# Altium PCB 2019_10_ELEV_18_IO.PcbDoc
Units mm, origin at the board's own origin, x right, y up, seen from the top; angles counter-clockwise.
Board outline 311.28 x 52.83 mm, 2 copper layers (Top Layer, Bottom Layer); 110 components, 96 nets, 320 pads, 0 vias.
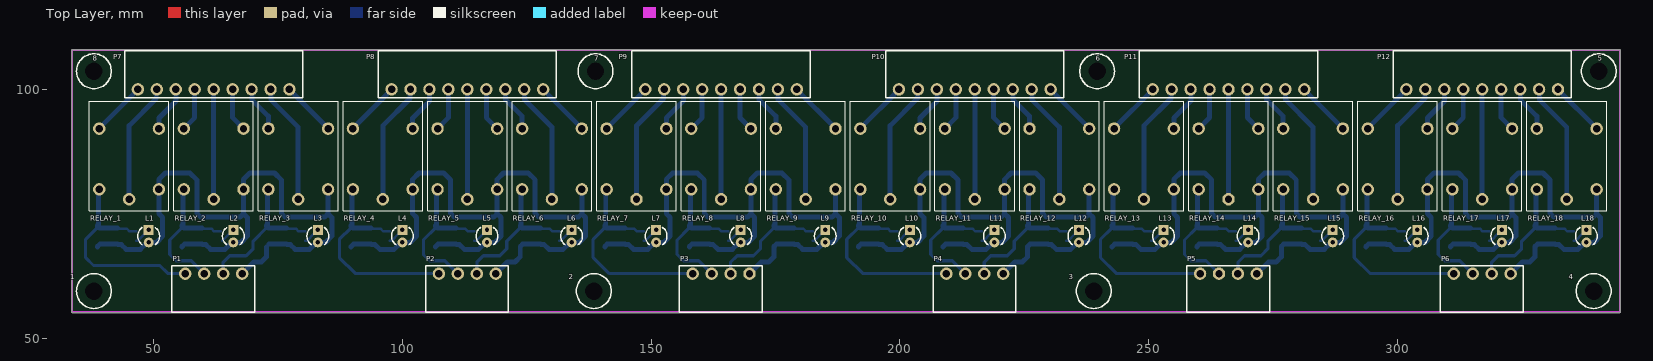
[diagram p0: Top Layer view]
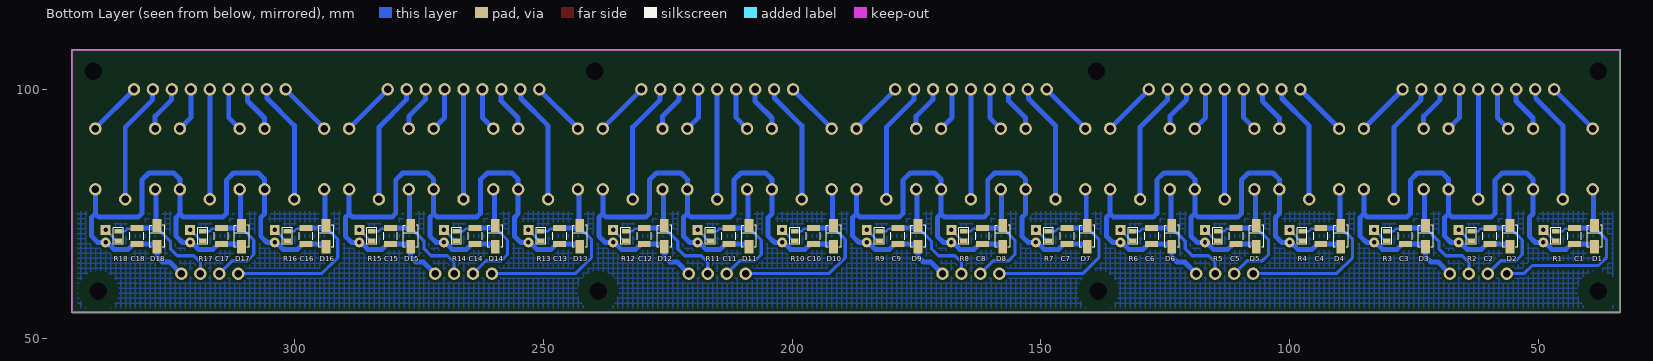
[diagram p1: Bottom Layer view, seen from below]
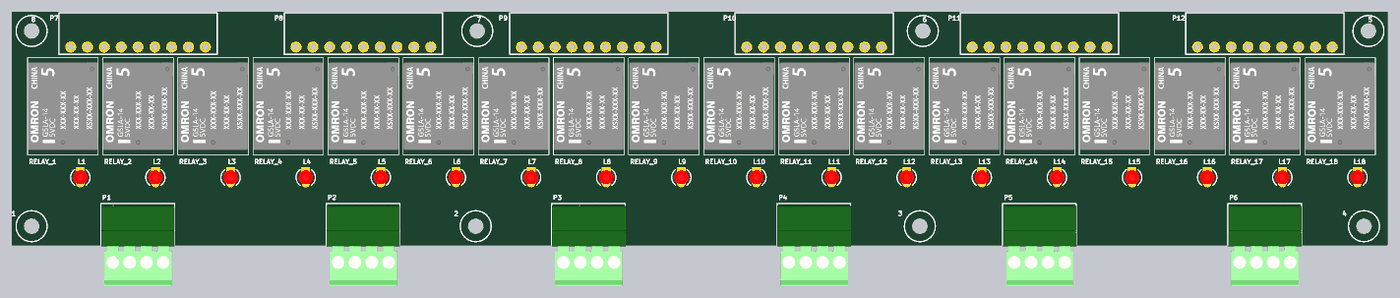
[diagram p2: 3D render of the assembled board from above, using the file's embedded part models]
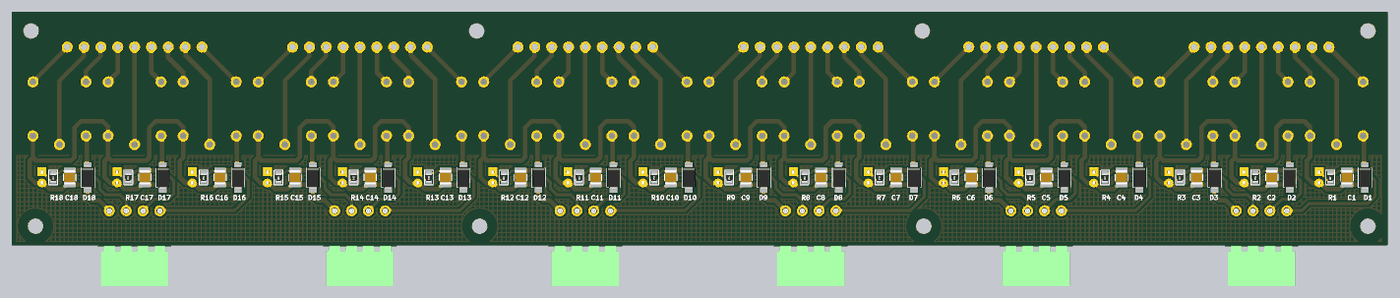
[diagram p3: 3D render of the assembled board from below, using the file's embedded part models]

## Layer stack, top to bottom
Top Solder: solder mask 0.0102, Solder Resist, Dk 3.5
Top Layer: signal copper 0.0356
Dielectric 1: dielectric 0.32, FR-4, Dk 4.8
Bottom Layer: signal copper 0.0356
Bottom Solder: solder mask 0.0102, Solder Resist, Dk 3.5

## Board outline
33.528,55.245 33.528,107.823 cw(c33.655,107.823) 33.655,107.95 344.678,107.95 cw(c344.678,107.823) 344.805,107.823 344.805,55.245 cw(c344.678,55.245) 344.678,55.118 33.655,55.118 cw(c33.655,55.245)

## Design rules (kind name [scope] priority, off if disabled: settings)
Clearance [All] p1: gap=0.508 ignorepadtopadclearanceinfootprint=FALSE
PolygonConnect [All] p1: connectstyle=Relief reliefconductorwidth=0.254 reliefentries=4 polygonreliefangle="90 Angle" airgapwidth=0.254
RoomDefinition 2019_10_ELEV_18_IO [InComponentClass('2019_10_ELEV_18_IO')] p1 off: confinementstyle=ConfineIn formatcopy=TRUE lockcomponents=FALSE outline 384.81,69.596 1269.746,69.596 1269.746,108.585 384.81,108.585
RoutingVias [All] p1: holewidth=0.711 width=1.27 viastyle="Through Hole" minholewidth=0.711 minwidth=1.27 maxholewidth=0.711 maxwidth=1.27
SolderMaskExpansion [All] p1: expansion=0.102
Width [All] p1: maxlimit=5 minlimit=0.254 preferedwidth=0.254
30 further rules are at their usual default settings.

## Components (designator, comment, footprint, x,y, rotation, side; value= is the part's Value field where it differs from the comment)
1 "LOVIT_1" VIT 37.973,59.436 r90 top
2 "LOVIT_1" VIT 138.472,59.436 r90 top
3 "LOVIT_1" VIT 238.972,59.436 r90 top
4 "LOVIT_1" VIT 339.471,59.436 r90 top
5 "LOVIT_1" VIT 340.487,103.632 r90 top
6 "LOVIT_1" VIT 239.649,103.632 r90 top
7 "LOVIT_1" VIT 138.811,103.632 r90 top
8 "LOVIT_1" VIT 37.973,103.632 r90 top
C1 "Capacitor" C1210C106M6PACTU 42.727,70.485 r270 bottom value=10uF/35V
C2 "Capacitor" C1210C106M6PACTU 59.727,70.485 r270 bottom value=10uF/35V
C3 "Capacitor" C1210C106M6PACTU 76.727,70.485 r270 bottom value=10uF/35V
C4 "Capacitor" C1210C106M6PACTU 93.727,70.485 r270 bottom value=10uF/35V
C5 "Capacitor" C1210C106M6PACTU 110.727,70.485 r270 bottom value=10uF/35V
C6 "Capacitor" C1210C106M6PACTU 127.727,70.485 r270 bottom value=10uF/35V
C7 "Capacitor" C1210C106M6PACTU 144.727,70.485 r270 bottom value=10uF/35V
C8 "Capacitor" C1210C106M6PACTU 161.727,70.485 r270 bottom value=10uF/35V
C9 "Capacitor" C1210C106M6PACTU 178.727,70.485 r270 bottom value=10uF/35V
C10 "Capacitor" C1210C106M6PACTU 195.727,70.485 r270 bottom value=10uF/35V
C11 "Capacitor" C1210C106M6PACTU 212.727,70.485 r270 bottom value=10uF/35V
C12 "Capacitor" C1210C106M6PACTU 229.727,70.485 r270 bottom value=10uF/35V
C13 "Capacitor" C1210C106M6PACTU 246.727,70.485 r270 bottom value=10uF/35V
C14 "Capacitor" C1210C106M6PACTU 263.727,70.485 r270 bottom value=10uF/35V
C15 "Capacitor" C1210C106M6PACTU 280.727,70.485 r270 bottom value=10uF/35V
C16 "Capacitor" C1210C106M6PACTU 297.727,70.485 r270 bottom value=10uF/35V
C17 "Capacitor" C1210C106M6PACTU 314.727,70.485 r270 bottom value=10uF/35V
C18 "Capacitor" C1210C106M6PACTU 331.727,70.485 r270 bottom value=10uF/35V
D1 "1N4007" DO-214AC 38.684,70.485 r90 bottom
D2 "1N4007" DO-214AC 55.684,70.485 r90 bottom
D3 "1N4007" DO-214AC 72.684,70.485 r90 bottom
D4 "1N4007" DO-214AC 89.684,70.485 r90 bottom
D5 "1N4007" DO-214AC 106.684,70.485 r90 bottom
D6 "1N4007" DO-214AC 123.684,70.485 r90 bottom
D7 "1N4007" DO-214AC 140.684,70.485 r90 bottom
D8 "1N4007" DO-214AC 157.684,70.485 r90 bottom
D9 "1N4007" DO-214AC 174.684,70.485 r90 bottom
D10 "1N4007" DO-214AC 191.684,70.485 r90 bottom
D11 "1N4007" DO-214AC 208.684,70.485 r90 bottom
D12 "1N4007" DO-214AC 225.684,70.485 r90 bottom
D13 "1N4007" DO-214AC 242.684,70.485 r90 bottom
D14 "1N4007" DO-214AC 259.684,70.485 r90 bottom
D15 "1N4007" DO-214AC 276.684,70.485 r90 bottom
D16 "1N4007" DO-214AC 293.684,70.485 r90 bottom
D17 "1N4007" DO-214AC 310.684,70.485 r90 bottom
D18 "1N4007" DO-214AC 327.684,70.485 r90 bottom
L1 "LED0" LED_3MM 49,70.489 r270 top
L2 "LED0" LED_3MM 66,70.489 r270 top
L3 "LED0" LED_3MM 83,70.489 r270 top
L4 "LED0" LED_3MM 100,70.489 r270 top
L5 "LED0" LED_3MM 117,70.489 r270 top
L6 "LED0" LED_3MM 134,70.489 r270 top
L7 "LED0" LED_3MM 151,70.489 r270 top
L8 "LED0" LED_3MM 168,70.489 r270 top
L9 "LED0" LED_3MM 185,70.489 r270 top
L10 "LED0" LED_3MM 202,70.489 r270 top
L11 "LED0" LED_3MM 219,70.489 r270 top
L12 "LED0" LED_3MM 236,70.489 r270 top
L13 "LED0" LED_3MM 253,70.489 r270 top
L14 "LED0" LED_3MM 270,70.489 r270 top
L15 "LED0" LED_3MM 287,70.489 r270 top
L16 "LED0" LED_3MM 304,70.489 r270 top
L17 "LED0" LED_3MM 321,70.489 r270 top
L18 "LED0" LED_3MM 338,70.489 r270 top
P1 "Header 4" TERMINAL_4PIN_381MM 62.054,62.928 r0 top
P2 "Header 4" TERMINAL_4PIN_381MM 113.054,62.928 r0 top
P3 "Header 4" TERMINAL_4PIN_381MM 164.054,62.928 r0 top
P4 "Header 4" TERMINAL_4PIN_381MM 215.054,62.928 r0 top
P5 "Header 4" TERMINAL_4PIN_381MM 266.054,62.928 r0 top
P6 "Header 4" TERMINAL_4PIN_381MM 317.054,62.928 r0 top
P7 "Header 9" TERMINAL_6PIN_381MM 62.054,100 r180 top
P8 "Header 9" TERMINAL_6PIN_381MM 113.054,100 r180 top
P9 "Header 9" TERMINAL_6PIN_381MM 164.054,100 r180 top
P10 "Header 9" TERMINAL_6PIN_381MM 215.054,100 r180 top
P11 "Header 9" TERMINAL_6PIN_381MM 266.054,100 r180 top
P12 "Header 9" TERMINAL_6PIN_381MM 317.054,100 r180 top
R1 "Resistor" CRCW080510K0FKEAC 46.482,70.485 r90 bottom value=2K2
R2 "Resistor" CRCW080510K0FKEAC 63.482,70.485 r90 bottom value=2K2
R3 "Resistor" CRCW080510K0FKEAC 80.482,70.485 r90 bottom value=2K2
R4 "Resistor" CRCW080510K0FKEAC 97.482,70.485 r90 bottom value=2K2
R5 "Resistor" CRCW080510K0FKEAC 114.482,70.485 r90 bottom value=2K2
R6 "Resistor" CRCW080510K0FKEAC 131.482,70.485 r90 bottom value=2K2
R7 "Resistor" CRCW080510K0FKEAC 148.482,70.485 r90 bottom value=2K2
R8 "Resistor" CRCW080510K0FKEAC 165.482,70.485 r90 bottom value=2K2
R9 "Resistor" CRCW080510K0FKEAC 182.482,70.485 r90 bottom value=2K2
R10 "Resistor" CRCW080510K0FKEAC 199.482,70.485 r90 bottom value=2K2
R11 "Resistor" CRCW080510K0FKEAC 216.482,70.485 r90 bottom value=2K2
R12 "Resistor" CRCW080510K0FKEAC 233.482,70.485 r90 bottom value=2K2
R13 "Resistor" CRCW080510K0FKEAC 250.482,70.485 r90 bottom value=2K2
R14 "Resistor" CRCW080510K0FKEAC 267.482,70.485 r90 bottom value=2K2
R15 "Resistor" CRCW080510K0FKEAC 284.482,70.485 r90 bottom value=2K2
R16 "Resistor" CRCW080510K0FKEAC 301.482,70.485 r90 bottom value=2K2
R17 "Resistor" CRCW080510K0FKEAC 318.482,70.485 r90 bottom value=2K2
R18 "Resistor" CRCW080510K0FKEAC 335.482,70.485 r90 bottom value=2K2
RELAY_1 "Component_1" RELAY_JS1-24V-F 45.054,85 r90 top
RELAY_2 "Component_1" RELAY_JS1-24V-F 62.054,85 r90 top
RELAY_3 "Component_1" RELAY_JS1-24V-F 79.054,85 r90 top
RELAY_4 "Component_1" RELAY_JS1-24V-F 96.054,85 r90 top
RELAY_5 "Component_1" RELAY_JS1-24V-F 113.054,85 r90 top
RELAY_6 "Component_1" RELAY_JS1-24V-F 130.054,85 r90 top
RELAY_7 "Component_1" RELAY_JS1-24V-F 147.054,85 r90 top
RELAY_8 "Component_1" RELAY_JS1-24V-F 164.054,85 r90 top
RELAY_9 "Component_1" RELAY_JS1-24V-F 181.054,85 r90 top
RELAY_10 "Component_1" RELAY_JS1-24V-F 198.054,85 r90 top
RELAY_11 "Component_1" RELAY_JS1-24V-F 215.054,85 r90 top
RELAY_12 "Component_1" RELAY_JS1-24V-F 232.054,85 r90 top
RELAY_13 "Component_1" RELAY_JS1-24V-F 249.054,85 r90 top
RELAY_14 "Component_1" RELAY_JS1-24V-F 266.054,85 r90 top
RELAY_15 "Component_1" RELAY_JS1-24V-F 283.054,85 r90 top
RELAY_16 "Component_1" RELAY_JS1-24V-F 300.054,85 r90 top
RELAY_17 "Component_1" RELAY_JS1-24V-F 317.054,85 r90 top
RELAY_18 "Component_1" RELAY_JS1-24V-F 334.054,85 r90 top

## Footprints (in the part's own frame and the unit in brackets; to place one, negate y for a bottom-side part, rotate by r counter-clockwise, add the part's x,y. Pads: shape width x height; smd on the part's side, far side on the other; paste and mask are expansions set on the pad)
C1210C106M6PACTU [mm] "Multilayer Ceramic Capacitors MLCC - SMD/SMT 35V 10uF X5R 1210 20%"
  rect 1.2x2.6 smd: 1(-1.6,0) 2(1.6,0)
  silkscreen extent -0.76,-1.4 0.76,1.4, body extent -1.6,-1.25 1.6,1.25, height 1
CRCW080510K0FKEAC [mm] "Thick Film Resistors - SMD 1/8Watt 10Kohms 1%"
  rect 0.9x1.5 smd: 1(-0.95,0) 2(0.95,0)
  silkscreen extent -1.65,-0.98 1.65,0.98, body extent -1.13,-0.63 0.87,0.62, height 0.46
DO-214AC [mm]
  rect 2.65x1.75 smd: 1(-2.15,0) 2(2.15,0)
  silkscreen extent -2.23,-1.52 2.14,1.45, body extent -2.71,-1.53 2.89,1.42, height 2.7
LED_3MM [mm]
  rect 2x2 hole 0.9: 1(-1.27,0)
  round 2 hole 0.9: 2(1.27,0)
  silkscreen extent -1.78,-2.19 1.78,2.18, body extent -1.66,-1.65 1.55,1.64, height 4.98
RELAY_JS1-24V-F [mm]
  round 2.5 hole 1.5: 1(-5.1,6) 2(-5.1,-6) 3(7.1,-6) 4(7.1,6) 5(-7.1,0)
  silkscreen extent -9.4,-8 12.6,8, body extent -8.3,-7.9 11.5,7.9, height 15.8
TERMINAL_4PIN_381MM [mm]
  round 2.5 hole 1.5: 1(-5.715,0) 2(-1.905,0) 3(1.905,0) 4(5.715,0)
  silkscreen extent -8.38,-7.75 8.25,1.65, body extent -8.31,-17.13 8.31,1.27, height 7.89
TERMINAL_6PIN_381MM [mm]
  round 2.5 hole 1.5: 1(-15.24,0) 2(-11.43,0) 3(-7.62,0) 4(-3.81,0) 5(0,0) 6(3.81,0) 7(7.62,0) 8(11.43,0) 9(15.24,0)
  silkscreen extent -17.91,-7.75 17.91,1.65
VIT [mm]
  round 0 hole 3.5: 1(0,0)
  silkscreen extent -3.5,-3.5 3.5,3.5

## Part data
C1 C2 C3 C4 C5 C6 C7 C8 C9 C10 C11 C12 C13 C14 C15 C16 C17 C18: library part C1210C106M6PAC, "Multilayer Ceramic Capacitors MLCC - SMD/SMT 35V 10uF X5R 1210 20%", Supplier Part Number 1=80-C1210C106M6PAC, Supplier 1=Mouser
D1 D2 D3 D4 D5 D6 D7 D8 D9 D10 D11 D12 D13 D14 D15 D16 D17 D18: library part BYG21M-E3/TR, "Diode Rectifiers 1.5 Amp 1000 Volt", Supplier Part Number 1=625-BYG21M-E3, Supplier 1=Mouser
L1 L2 L3 L4 L5 L6 L7 L8 L9 L10 L11 L12 L13 L14 L15 L16 L17 L18: "Typical INFRARED GaAs LED", LatestRevisionDate=08-Jul-2005, LatestRevisionNote="Mech Layer 1 removed.", PackageDescription="LED; 2 Leads", PackageReference=LED-0, Published=8-Jun-2000, Publisher="Altium Limited"
P1 P2 P3 P4 P5 P6: "Header, 4-Pin", LatestRevisionDate=17-Jul-2002, LatestRevisionNote="Re-released for DXP Platform.", Publisher="Altium Limited"
P7 P8 P9 P10 P11 P12: "Header, 9-Pin", LatestRevisionDate=17-Jul-2002, LatestRevisionNote="Re-released for DXP Platform.", Publisher="Altium Limited"
R1 R2 R3 R4 R5 R6 R7 R8 R9 R10 R11 R12 R13 R14 R15 R16 R17 R18: library part RC0805JR-131KL, "Thick Film Resistors - SMD 1K OHM 5%", Supplier Part Number 1=603-RC0805JR-131KL, Supplier 1=Mouser

## Nets (pads, with @x,y where several pads share a name; then routed paths per layer and width w, separated by ;. In a path a pad name is that pad's centre, name@x,y a point inside that pad or via, vN(x,y) a via of type N, cw(c..) or ccw(c..) an arc to the next point about the centre after c; other vN are vias at no path point)
COM_RELAY_1: P7.8 RELAY_1.5 | length 24.4
  Bottom Layer w1: RELAY_1.5 45.054,92.679 50.514,98.139 50.514,99.89 P7.8
COM_RELAY_2: P7.5 RELAY_2.5 | length 22.1
  Bottom Layer w1: RELAY_2.5 P7.5
COM_RELAY_3: P7.2 RELAY_3.5 | length 24.4
  Bottom Layer w1: P7.2 73.533,99.951 73.533,97.917 79.054,92.396 RELAY_3.5
COM_RELAY_4: P8.8 RELAY_4.5 | length 24.4
  Bottom Layer w1: RELAY_4.5 96.054,92.679 101.514,98.139 101.514,99.89 P8.8
COM_RELAY_5: P8.5 RELAY_5.5 | length 22.1
  Bottom Layer w1: RELAY_5.5 P8.5
COM_RELAY_6: P8.2 RELAY_6.5 | length 24.4
  Bottom Layer w1: P8.2 124.533,99.951 124.533,97.917 130.054,92.396 RELAY_6.5
COM_RELAY_7: P9.8 RELAY_7.5 | length 24.4
  Bottom Layer w1: RELAY_7.5 147.054,92.679 152.514,98.139 152.514,99.89 P9.8
COM_RELAY_8: P9.5 RELAY_8.5 | length 22.1
  Bottom Layer w1: RELAY_8.5 P9.5
COM_RELAY_9: P9.2 RELAY_9.5 | length 24.4
  Bottom Layer w1: P9.2 175.533,99.951 175.533,97.917 181.054,92.396 RELAY_9.5
COM_RELAY_10: P10.8 RELAY_10.5 | length 24.4
  Bottom Layer w1: RELAY_10.5 198.054,92.679 203.514,98.139 203.514,99.89 P10.8
COM_RELAY_11: P10.5 RELAY_11.5 | length 22.1
  Bottom Layer w1: RELAY_11.5 P10.5
COM_RELAY_12: P10.2 RELAY_12.5 | length 24.4
  Bottom Layer w1: P10.2 226.533,99.951 226.533,97.917 232.054,92.396 RELAY_12.5
COM_RELAY_13: P11.8 RELAY_13.5 | length 24.4
  Bottom Layer w1: RELAY_13.5 249.054,92.679 254.514,98.139 254.514,99.89 P11.8
COM_RELAY_14: P11.5 RELAY_14.5 | length 22.1
  Bottom Layer w1: RELAY_14.5 P11.5
COM_RELAY_15: P11.2 RELAY_15.5 | length 24.4
  Bottom Layer w1: P11.2 277.533,99.951 277.533,97.917 283.054,92.396 RELAY_15.5
COM_RELAY_16: P12.8 RELAY_16.5 | length 24.4
  Bottom Layer w1: RELAY_16.5 300.054,92.679 305.514,98.139 305.514,99.89 P12.8
COM_RELAY_17: P12.5 RELAY_17.5 | length 22.1
  Bottom Layer w1: RELAY_17.5 P12.5
COM_RELAY_18: P12.2 RELAY_18.5 | length 24.4
  Bottom Layer w1: P12.2 328.533,99.951 328.533,97.917 334.054,92.396 RELAY_18.5
NC_RELAY_1: P7.9 RELAY_1.4 | length 11.1
  Bottom Layer w1: RELAY_1.4 39.054,92.17 46.814,99.93 P7.9
NC_RELAY_2: P7.6 RELAY_2.4 | length 8.8
  Bottom Layer w1: RELAY_2.4 58.244,94.29 P7.6
NC_RELAY_3: P7.3 RELAY_3.4 | length 9.3
  Bottom Layer w1: P7.3 69.723,99.951 69.723,97.917 73.054,94.586 RELAY_3.4
NC_RELAY_4: P8.9 RELAY_4.4 | length 11.1
  Bottom Layer w1: RELAY_4.4 90.054,92.17 97.814,99.93 P8.9
NC_RELAY_5: P8.6 RELAY_5.4 | length 8.8
  Bottom Layer w1: RELAY_5.4 109.244,94.29 P8.6
NC_RELAY_6: P8.3 RELAY_6.4 | length 9.3
  Bottom Layer w1: P8.3 120.723,99.951 120.723,97.917 124.054,94.586 RELAY_6.4
NC_RELAY_7: P9.9 RELAY_7.4 | length 11.1
  Bottom Layer w1: RELAY_7.4 141.054,92.17 148.814,99.93 P9.9
NC_RELAY_8: P9.6 RELAY_8.4 | length 8.8
  Bottom Layer w1: RELAY_8.4 160.244,94.29 P9.6
NC_RELAY_9: P9.3 RELAY_9.4 | length 9.3
  Bottom Layer w1: P9.3 171.723,99.951 171.723,97.917 175.054,94.586 RELAY_9.4
NC_RELAY_10: P10.9 RELAY_10.4 | length 11.1
  Bottom Layer w1: RELAY_10.4 192.054,92.17 199.814,99.93 P10.9
NC_RELAY_11: P10.6 RELAY_11.4 | length 8.8
  Bottom Layer w1: RELAY_11.4 211.244,94.29 P10.6
NC_RELAY_12: P10.3 RELAY_12.4 | length 9.3
  Bottom Layer w1: P10.3 222.723,99.951 222.723,97.917 226.054,94.586 RELAY_12.4
NC_RELAY_13: P11.9 RELAY_13.4 | length 11.1
  Bottom Layer w1: RELAY_13.4 243.054,92.17 250.814,99.93 P11.9
NC_RELAY_14: P11.6 RELAY_14.4 | length 8.8
  Bottom Layer w1: RELAY_14.4 262.244,94.29 P11.6
NC_RELAY_15: P11.3 RELAY_15.4 | length 9.3
  Bottom Layer w1: P11.3 273.723,99.951 273.723,97.917 277.054,94.586 RELAY_15.4
NC_RELAY_16: P12.9 RELAY_16.4 | length 11.1
  Bottom Layer w1: RELAY_16.4 294.054,92.17 301.814,99.93 P12.9
NC_RELAY_17: P12.6 RELAY_17.4 | length 8.8
  Bottom Layer w1: RELAY_17.4 313.244,94.29 P12.6
NC_RELAY_18: P12.3 RELAY_18.4 | length 9.3
  Bottom Layer w1: P12.3 324.723,99.951 324.723,97.917 328.054,94.586 RELAY_18.4
NetL1_1: L1.1 R1.1 | length 3.4
  Bottom Layer w0.508: R1.1 46.782,69.535 48.254,71.007 48.254,71.013 L1.1
NetL2_1: L2.1 R2.1 | length 3.1
  Bottom Layer w0.508: R2.1@63.782,69.535 65.254,71.007 65.254,71.013 L2.1
NetL3_1: L3.1 R3.1 | length 3.4
  Bottom Layer w0.508: R3.1 80.782,69.535 82.254,71.007 82.254,71.013 L3.1
NetL4_1: L4.1 R4.1 | length 3.4
  Bottom Layer w0.508: R4.1 97.782,69.535 99.254,71.007 99.254,71.013 L4.1
NetL5_1: L5.1 R5.1 | length 3.4
  Bottom Layer w0.508: R5.1 114.782,69.535 116.254,71.007 116.254,71.013 L5.1
NetL6_1: L6.1 R6.1 | length 3.4
  Bottom Layer w0.508: R6.1 131.782,69.535 133.254,71.007 133.254,71.013 L6.1
NetL7_1: L7.1 R7.1 | length 3.4
  Bottom Layer w0.508: R7.1 148.782,69.535 150.254,71.007 150.254,71.013 L7.1
NetL8_1: L8.1 R8.1 | length 3.4
  Bottom Layer w0.508: R8.1 165.782,69.535 167.254,71.007 167.254,71.013 L8.1
NetL9_1: L9.1 R9.1 | length 3.4
  Bottom Layer w0.508: R9.1 182.782,69.535 184.254,71.007 184.254,71.013 L9.1
NetL10_1: L10.1 R10.1 | length 3.4
  Bottom Layer w0.508: R10.1 199.782,69.535 201.254,71.007 201.254,71.013 L10.1
NetL11_1: L11.1 R11.1 | length 3.4
  Bottom Layer w0.508: R11.1 216.782,69.535 218.254,71.007 218.254,71.013 L11.1
NetL12_1: L12.1 R12.1 | length 3.4
  Bottom Layer w0.508: R12.1 233.782,69.535 235.254,71.007 235.254,71.013 L12.1
NetL13_1: L13.1 R13.1 | length 3.4
  Bottom Layer w0.508: R13.1 250.782,69.535 252.254,71.007 252.254,71.013 L13.1
NetL14_1: L14.1 R14.1 | length 3.4
  Bottom Layer w0.508: R14.1 267.782,69.535 269.254,71.007 269.254,71.013 L14.1
NetL15_1: L15.1 R15.1 | length 3.4
  Bottom Layer w0.508: R15.1 284.782,69.535 286.254,71.007 286.254,71.013 L15.1
NetL16_1: L16.1 R16.1 | length 3.4
  Bottom Layer w0.508: R16.1 301.782,69.535 303.254,71.007 303.254,71.013 L16.1
NetL17_1: L17.1 R17.1 | length 3.4
  Bottom Layer w0.508: R17.1 318.782,69.535 320.254,71.007 320.254,71.013 L17.1
NetL18_1: L18.1 R18.1 | length 3.4
  Bottom Layer w0.508: R18.1 335.782,69.535 337.254,71.007 337.254,71.013 L18.1
NO_RELAY_1: P7.7 RELAY_1.3 | length 9.3
  Bottom Layer w1: RELAY_1.3 51.054,94.234 54.483,97.663 54.483,99.951 P7.7
NO_RELAY_2: P7.4 RELAY_2.3 | length 8.8
  Bottom Layer w1: P7.4 65.864,94.29 RELAY_2.3
NO_RELAY_3: P7.1 RELAY_3.3 | length 11.1
  Bottom Layer w1: P7.1 77.294,99.93 85.054,92.17 RELAY_3.3
NO_RELAY_4: P8.7 RELAY_4.3 | length 9.3
  Bottom Layer w1: RELAY_4.3 102.054,94.234 105.483,97.663 105.483,99.951 P8.7
NO_RELAY_5: P8.4 RELAY_5.3 | length 8.8
  Bottom Layer w1: P8.4 116.864,94.29 RELAY_5.3
NO_RELAY_6: P8.1 RELAY_6.3 | length 11.1
  Bottom Layer w1: P8.1 128.294,99.93 136.054,92.17 RELAY_6.3
NO_RELAY_7: P9.7 RELAY_7.3 | length 9.3
  Bottom Layer w1: RELAY_7.3 153.054,94.234 156.483,97.663 156.483,99.951 P9.7
NO_RELAY_8: P9.4 RELAY_8.3 | length 8.8
  Bottom Layer w1: P9.4 167.864,94.29 RELAY_8.3
NO_RELAY_9: P9.1 RELAY_9.3 | length 11.1
  Bottom Layer w1: P9.1 179.294,99.93 187.054,92.17 RELAY_9.3
NO_RELAY_10: P10.7 RELAY_10.3 | length 9.3
  Bottom Layer w1: RELAY_10.3 204.054,94.234 207.483,97.663 207.483,99.951 P10.7
NO_RELAY_11: P10.4 RELAY_11.3 | length 8.8
  Bottom Layer w1: P10.4 218.864,94.29 RELAY_11.3
NO_RELAY_12: P10.1 RELAY_12.3 | length 11.1
  Bottom Layer w1: P10.1 230.294,99.93 238.054,92.17 RELAY_12.3
NO_RELAY_13: P11.7 RELAY_13.3 | length 9.3
  Bottom Layer w1: RELAY_13.3 255.054,94.234 258.483,97.663 258.483,99.951 P11.7
NO_RELAY_14: P11.4 RELAY_14.3 | length 8.8
  Bottom Layer w1: P11.4 269.864,94.29 RELAY_14.3
NO_RELAY_15: P11.1 RELAY_15.3 | length 11.1
  Bottom Layer w1: P11.1 281.294,99.93 289.054,92.17 RELAY_15.3
NO_RELAY_16: P12.7 RELAY_16.3 | length 9.3
  Bottom Layer w1: RELAY_16.3 306.054,94.234 309.483,97.663 309.483,99.951 P12.7
NO_RELAY_17: P12.4 RELAY_17.3 | length 8.8
  Bottom Layer w1: P12.4 320.864,94.29 RELAY_17.3
NO_RELAY_18: P12.1 RELAY_18.3 | length 11.1
  Bottom Layer w1: P12.1 332.294,99.93 340.054,92.17 RELAY_18.3
SIG_COM_1: C1.2 C2.2 C3.2 D1.1 D2.1 D3.1 L1.2 L2.2 L3.2 P1.4 RELAY_1.2 RELAY_2.2 RELAY_3.2 | length 136.5
  Bottom Layer w1: D1.1 38.684,68.41 39.159,68.885 C1.2 42.827,68.785 43.483,68.785 44.45,67.818 47.329,67.818 48.729,69.219 L1.2 50.55,69.219 51.816,70.485 51.816,74.228 51.054,74.99 RELAY_1.2 51.054,81.915 52.324,83.185 57.277,83.185 58.674,81.788 58.674,75.057 59.436,74.295 67.359,74.295 68.054,74.99 ; D2.1 55.684,68.41 56.159,68.885 C2.2 59.827,68.785 60.483,68.785 61.45,67.818 64.329,67.818 65.729,69.219 L2.2 67.55,69.219 68.816,70.485 68.816,74.228 68.054,74.99 ; P1.4 70.119,65.278 71.628,65.278 72.684,66.334 D3.1 ; D3.1@73.159,68.885 C3.2 76.827,68.785 77.483,68.785 78.45,67.818 81.329,67.818 82.729,69.219 L3.2 84.55,69.219 85.816,70.485 85.816,74.228 85.054,74.99 ; RELAY_3.2 85.054,74.99 ; 68.054,74.99 RELAY_2.2 68.054,81.915 69.324,83.185 74.277,83.185 75.674,81.788 75.674,75.057 76.436,74.295 84.359,74.295 85.054,74.99
SIG_COM_2: C4.2 C5.2 C6.2 D4.1 D5.1 D6.1 L4.2 L5.2 L6.2 P2.4 RELAY_4.2 RELAY_5.2 RELAY_6.2 | length 137.3
  Bottom Layer w1: D4.1 89.684,68.41 90.159,68.885 C4.2 93.827,68.785 94.483,68.785 95.45,67.818 98.329,67.818 99.729,69.219 L4.2 101.55,69.219 102.816,70.485 102.816,74.228 102.054,74.99 RELAY_4.2 102.054,81.915 103.324,83.185 108.277,83.185 109.674,81.788 109.674,75.057 110.436,74.295 118.359,74.295 119.054,74.99 ; D5.1 106.684,68.41 107.159,68.885 C5.2 110.827,68.785 111.483,68.785 112.45,67.818 115.329,67.818 116.729,69.219 L5.2 118.55,69.219 119.816,70.485 119.816,74.228 119.054,74.99 ; P2.4 121.119,65.278 122.628,65.278 123.684,66.334 D6.1 123.684,68.41 124.159,68.885 C6.2 127.827,68.785 128.483,68.785 129.45,67.818 132.329,67.818 133.729,69.219 L6.2 135.55,69.219 136.816,70.485 136.816,74.228 136.054,74.99 ; RELAY_6.2 136.054,74.99 ; 119.054,74.99 RELAY_5.2 119.054,81.915 120.324,83.185 125.277,83.185 126.674,81.788 126.674,75.057 127.436,74.295 135.359,74.295 136.054,74.99
SIG_COM_3: C7.2 C8.2 C9.2 D7.1 D8.1 D9.1 L7.2 L8.2 L9.2 P3.4 RELAY_7.2 RELAY_8.2 RELAY_9.2 | length 137.3
  Bottom Layer w1: D7.1 140.684,68.41 141.159,68.885 C7.2 144.827,68.785 145.483,68.785 146.45,67.818 149.329,67.818 150.729,69.219 L7.2 152.55,69.219 153.816,70.485 153.816,74.228 153.054,74.99 RELAY_7.2 153.054,81.915 154.324,83.185 159.277,83.185 160.674,81.788 160.674,75.057 161.436,74.295 169.359,74.295 170.054,74.99 ; D8.1 157.684,68.41 158.159,68.885 C8.2 161.827,68.785 162.483,68.785 163.45,67.818 166.329,67.818 167.729,69.219 L8.2 169.55,69.219 170.816,70.485 170.816,74.228 170.054,74.99 ; P3.4 172.119,65.278 173.628,65.278 174.684,66.334 D9.1 174.684,68.41 175.159,68.885 C9.2 178.827,68.785 179.483,68.785 180.45,67.818 183.329,67.818 184.729,69.219 L9.2 186.55,69.219 187.816,70.485 187.816,74.228 187.054,74.99 ; RELAY_9.2 187.054,74.99 ; 170.054,74.99 RELAY_8.2 170.054,81.915 171.324,83.185 176.277,83.185 177.674,81.788 177.674,75.057 178.436,74.295 186.359,74.295 187.054,74.99
SIG_COM_4: C10.2 C11.2 C12.2 D10.1 D11.1 D12.1 L10.2 L11.2 L12.2 P4.4 RELAY_10.2 RELAY_11.2 RELAY_12.2 | length 137.3
  Bottom Layer w1: D10.1 191.684,68.41 192.159,68.885 C10.2 195.827,68.785 196.483,68.785 197.45,67.818 200.329,67.818 201.729,69.219 L10.2 203.55,69.219 204.816,70.485 204.816,74.228 204.054,74.99 RELAY_10.2 204.054,81.915 205.324,83.185 210.277,83.185 211.674,81.788 211.674,75.057 212.436,74.295 220.359,74.295 221.054,74.99 ; D11.1 208.684,68.41 209.159,68.885 C11.2 212.827,68.785 213.483,68.785 214.45,67.818 217.329,67.818 218.729,69.219 L11.2 220.55,69.219 221.816,70.485 221.816,74.228 221.054,74.99 ; P4.4 223.119,65.278 224.628,65.278 225.684,66.334 D12.1 225.684,68.41 226.159,68.885 C12.2 229.827,68.785 230.483,68.785 231.45,67.818 234.329,67.818 235.729,69.219 L12.2 237.55,69.219 238.816,70.485 238.816,74.228 238.054,74.99 ; RELAY_12.2 238.054,74.99 ; 221.054,74.99 RELAY_11.2 221.054,81.915 222.324,83.185 227.277,83.185 228.674,81.788 228.674,75.057 229.436,74.295 237.359,74.295 238.054,74.99
SIG_COM_5: C13.2 C14.2 C15.2 D13.1 D14.1 D15.1 L13.2 L14.2 L15.2 P5.4 RELAY_13.2 RELAY_14.2 RELAY_15.2 | length 137.3
  Bottom Layer w1: D13.1 242.684,68.41 243.159,68.885 246.727,68.885 246.827,68.785 247.483,68.785 248.45,67.818 251.329,67.818 252.729,69.219 L13.2 254.55,69.219 255.816,70.485 255.816,74.228 255.054,74.99 RELAY_13.2 255.054,81.915 256.324,83.185 261.277,83.185 262.674,81.788 262.674,75.057 263.436,74.295 271.359,74.295 272.054,74.99 ; D14.1 259.684,68.41 260.159,68.885 C14.2 263.827,68.785 264.483,68.785 265.45,67.818 268.329,67.818 269.729,69.219 L14.2 271.55,69.219 272.816,70.485 272.816,74.228 272.054,74.99 ; P5.4 274.119,65.278 275.628,65.278 276.684,66.334 D15.1 276.684,68.41 277.159,68.885 C15.2 280.827,68.785 281.483,68.785 282.45,67.818 285.329,67.818 286.729,69.219 L15.2 288.55,69.219 289.816,70.485 289.816,74.228 289.054,74.99 ; RELAY_15.2 289.054,74.99 ; 272.054,74.99 RELAY_14.2 272.054,81.915 273.324,83.185 278.277,83.185 279.674,81.788 279.674,75.057 280.436,74.295 288.359,74.295 289.054,74.99
SIG_COM_6: C16.2 C17.2 C18.2 D16.1 D17.1 D18.1 L16.2 L17.2 L18.2 P6.4 RELAY_16.2 RELAY_17.2 RELAY_18.2 | length 137.3
  Bottom Layer w1: D16.1 293.684,68.41 294.159,68.885 C16.2 297.827,68.785 298.483,68.785 299.45,67.818 302.329,67.818 303.729,69.219 L16.2 305.55,69.219 306.816,70.485 306.816,74.228 306.054,74.99 RELAY_16.2 306.054,81.915 307.324,83.185 312.277,83.185 313.674,81.788 313.674,75.057 314.436,74.295 322.359,74.295 323.054,74.99 ; D17.1 310.684,68.41 311.159,68.885 C17.2 314.827,68.785 315.483,68.785 316.45,67.818 319.329,67.818 320.729,69.219 L17.2 322.55,69.219 323.816,70.485 323.816,74.228 323.054,74.99 ; P6.4 325.119,65.278 326.628,65.278 327.684,66.334 D18.1 327.684,68.41 328.159,68.885 C18.2 331.827,68.785 332.483,68.785 333.45,67.818 336.329,67.818 337.729,69.219 L18.2 339.55,69.219 340.816,70.485 340.816,74.228 340.054,74.99 ; RELAY_18.2 340.054,74.99 ; 323.054,74.99 RELAY_17.2 323.054,81.915 324.324,83.185 329.277,83.185 330.674,81.788 330.674,75.057 331.436,74.295 339.359,74.295 340.054,74.99
SIG_IN_1: C1.1 D1.2 P1.1 R1.2 RELAY_1.1 | length 44.4
  Bottom Layer w0.508: C1.1 42.803,72.009 44.577,72.009 45.151,71.435 R1.2
  Bottom Layer w0.635: D1.2@38.684,72.46 38.684,72.185 36.322,69.823 36.322,66.167 37.91,64.579 51.244,64.579 52.832,62.992 56.275,62.992 P1.1
  Bottom Layer w1: RELAY_1.1 38.869,79.715 38.869,72.82 D1.2 38.684,72.46 39.059,72.085 C1.1
SIG_IN_2: C2.1 D2.2 P1.2 R2.2 RELAY_2.1 | length 31
  Bottom Layer w0.508: C2.1 59.803,72.009 61.577,72.009 62.151,71.435 R2.2
  Bottom Layer w0.635: D2.2@55.684,72.46 55.684,72.185 53.213,69.714 53.213,66.802 54.483,65.532 57.545,65.532 P1.2
  Bottom Layer w1: RELAY_2.1 55.869,79.715 55.869,72.82 D2.2 55.684,72.46 56.059,72.085 C2.1
SIG_IN_3: C3.1 D3.2 P1.3 R3.2 RELAY_3.1 | length 31.1
  Bottom Layer w0.508: C3.1 76.803,72.009 78.577,72.009 79.151,71.435 R3.2
  Bottom Layer w0.635: P1.3 63.959,65.229 65.278,66.548 68.58,66.548 69.977,67.945 69.977,69.478 72.684,72.185 D3.2
  Bottom Layer w1: RELAY_3.1 72.869,79.715 72.869,72.82 D3.2 72.684,72.46 73.059,72.085 C3.1
SIG_IN_4: C4.1 D4.2 P2.1 R4.2 RELAY_4.1 | length 44.1
  Bottom Layer w0.508: C4.1 93.803,72.009 95.577,72.009 96.151,71.435 R4.2
  Bottom Layer w0.635: D4.2@89.684,72.185 87.322,69.823 87.322,66.167 90.497,62.992 P2.1@107.275,62.992
  Bottom Layer w1: RELAY_4.1 89.869,79.715 89.869,72.82 D4.2 89.684,72.46 90.059,72.085 C4.1
SIG_IN_5: C5.1 D5.2 P2.2 R5.2 RELAY_5.1 | length 30.8
  Bottom Layer w0.508: C5.1 110.803,72.009 112.577,72.009 113.151,71.435 R5.2
  Bottom Layer w0.635: D5.2@106.684,72.185 104.213,69.714 104.213,66.802 105.483,65.532 108.545,65.532 P2.2
  Bottom Layer w1: RELAY_5.1 106.869,79.715 106.869,72.82 D5.2 106.684,72.46 107.059,72.085 C5.1
SIG_IN_6: C6.1 D6.2 P2.3 R6.2 RELAY_6.1 | length 30.6
  Bottom Layer w0.508: C6.1 127.803,72.009 129.577,72.009 130.151,71.435 R6.2
  Bottom Layer w0.635: P2.3 114.959,65.229 116.278,66.548 119.58,66.548 120.977,67.945 120.977,69.478 D6.2@123.684,72.185
  Bottom Layer w1: RELAY_6.1 123.869,79.715 123.869,72.82 D6.2 123.684,72.46 124.059,72.085 C6.1
SIG_IN_7: C7.1 D7.2 P3.1 R7.2 RELAY_7.1 | length 44.1
  Bottom Layer w0.508: C7.1 144.803,72.009 146.577,72.009 147.151,71.435 R7.2
  Bottom Layer w0.635: D7.2@140.684,72.185 138.322,69.823 138.322,66.167 141.497,62.992 P3.1@158.275,62.992
  Bottom Layer w1: RELAY_7.1 140.869,79.715 140.869,72.82 D7.2 140.684,72.46 141.059,72.085 C7.1
SIG_IN_8: C8.1 D8.2 P3.2 R8.2 RELAY_8.1 | length 30.8
  Bottom Layer w0.508: C8.1 161.803,72.009 163.577,72.009 164.151,71.435 R8.2
  Bottom Layer w0.635: D8.2@157.684,72.185 155.213,69.714 155.213,66.802 156.483,65.532 159.545,65.532 P3.2
  Bottom Layer w1: RELAY_8.1 157.869,79.715 157.869,72.82 D8.2 157.684,72.46 158.059,72.085 C8.1
SIG_IN_9: C9.1 D9.2 P3.3 R9.2 RELAY_9.1 | length 30.6
  Bottom Layer w0.508: C9.1 178.803,72.009 180.577,72.009 181.151,71.435 R9.2
  Bottom Layer w0.635: P3.3 165.959,65.229 167.278,66.548 170.58,66.548 171.977,67.945 171.977,69.478 D9.2@174.684,72.185
  Bottom Layer w1: RELAY_9.1 174.869,79.715 174.869,72.82 D9.2 174.684,72.46 175.059,72.085 C9.1
SIG_IN_10: C10.1 D10.2 P4.1 R10.2 RELAY_10.1 | length 44.1
  Bottom Layer w0.508: C10.1 195.803,72.009 197.577,72.009 198.151,71.435 R10.2
  Bottom Layer w0.635: D10.2@191.684,72.185 189.322,69.823 189.322,66.167 192.497,62.992 P4.1@209.275,62.992
  Bottom Layer w1: RELAY_10.1 191.869,79.715 191.869,72.82 D10.2 191.684,72.46 192.059,72.085 C10.1
SIG_IN_11: C11.1 D11.2 P4.2 R11.2 RELAY_11.1 | length 30.8
  Bottom Layer w0.508: C11.1 212.803,72.009 214.577,72.009 215.151,71.435 R11.2
  Bottom Layer w0.635: D11.2@208.684,72.185 206.213,69.714 206.213,66.802 207.483,65.532 210.545,65.532 P4.2
  Bottom Layer w1: RELAY_11.1 208.869,79.715 208.869,72.82 D11.2 208.684,72.46 209.059,72.085 C11.1
SIG_IN_12: C12.1 D12.2 P4.3 R12.2 RELAY_12.1 | length 30.6
  Bottom Layer w0.508: C12.1 229.803,72.009 231.577,72.009 232.151,71.435 R12.2
  Bottom Layer w0.635: P4.3 216.959,65.229 218.278,66.548 221.58,66.548 222.977,67.945 222.977,69.478 D12.2@225.684,72.185
  Bottom Layer w1: RELAY_12.1 225.869,79.715 225.869,72.82 D12.2 225.684,72.46 226.059,72.085 C12.1
SIG_IN_13: C13.1 D13.2 P5.1 R13.2 RELAY_13.1 | length 44.1
  Bottom Layer w0.508: C13.1@246.727,72.085 246.803,72.009 248.577,72.009 249.151,71.435 R13.2
  Bottom Layer w0.635: D13.2@242.684,72.185 240.322,69.823 240.322,66.167 243.497,62.992 P5.1@260.275,62.992
  Bottom Layer w1: RELAY_13.1 242.869,79.715 242.869,72.82 D13.2 242.684,72.46 243.059,72.085 C13.1@246.727,72.085
SIG_IN_14: C14.1 D14.2 P5.2 R14.2 RELAY_14.1 | length 30.8
  Bottom Layer w0.508: C14.1 263.803,72.009 265.577,72.009 266.151,71.435 R14.2
  Bottom Layer w0.635: D14.2@259.684,72.185 257.213,69.714 257.213,66.802 258.483,65.532 261.545,65.532 P5.2
  Bottom Layer w1: RELAY_14.1 259.869,79.715 259.869,72.82 D14.2 259.684,72.46 260.059,72.085 C14.1
SIG_IN_15: C15.1 D15.2 P5.3 R15.2 RELAY_15.1 | length 30.6
  Bottom Layer w0.508: C15.1 280.803,72.009 282.577,72.009 283.151,71.435 R15.2
  Bottom Layer w0.635: P5.3 267.959,65.229 269.278,66.548 272.58,66.548 273.977,67.945 273.977,69.478 D15.2@276.684,72.185
  Bottom Layer w1: RELAY_15.1 276.869,79.715 276.869,72.82 D15.2 276.684,72.46 277.059,72.085 C15.1
SIG_IN_16: C16.1 D16.2 P6.1 R16.2 RELAY_16.1 | length 44.1
  Bottom Layer w0.508: C16.1 297.803,72.009 299.577,72.009 300.151,71.435 R16.2
  Bottom Layer w0.635: D16.2@293.684,72.185 291.322,69.823 291.322,66.167 294.497,62.992 P6.1@311.275,62.992
  Bottom Layer w1: RELAY_16.1 293.869,79.715 293.869,72.82 D16.2 293.684,72.46 294.059,72.085 C16.1
SIG_IN_17: C17.1 D17.2 P6.2 R17.2 RELAY_17.1 | length 30.8
  Bottom Layer w0.508: C17.1 314.803,72.009 316.577,72.009 317.151,71.435 R17.2
  Bottom Layer w0.635: D17.2@310.684,72.185 308.213,69.714 308.213,66.802 309.483,65.532 312.545,65.532 P6.2
  Bottom Layer w1: RELAY_17.1 310.869,79.715 310.869,72.82 D17.2 310.684,72.46 311.059,72.085 C17.1
SIG_IN_18: C18.1 D18.2 P6.3 R18.2 RELAY_18.1 | length 30.6
  Bottom Layer w0.508: C18.1 331.803,72.009 333.577,72.009 334.151,71.435 R18.2
  Bottom Layer w0.635: P6.3 318.959,65.229 320.278,66.548 323.58,66.548 324.977,67.945 324.977,69.478 D18.2@327.684,72.185
  Bottom Layer w1: RELAY_18.1 327.869,79.715 327.869,72.82 D18.2 327.684,72.46 328.059,72.085 C18.1
pads on no net: 1.1 2.1 3.1 4.1 5.1 6.1 7.1 8.1

## Polygon pours and split planes (outlines as drawn)
no net on Bottom Layer "Bottom Layer-No Net" (hatched 90Degree grid 1 track 0.254, remove dead copper, pour order 0): 34.925,55.88 343.535,55.88 343.662,56.007 343.662,75.438 34.925,75.438

## Keep-outs
Keep-Out Layer:
  lines w0.254: 33.655,55.245 33.655,107.823 344.678,107.823 344.678,55.245 33.655,55.245